# EAGLE board RGBAmp_10x10 (EAGLE 6.6.0)
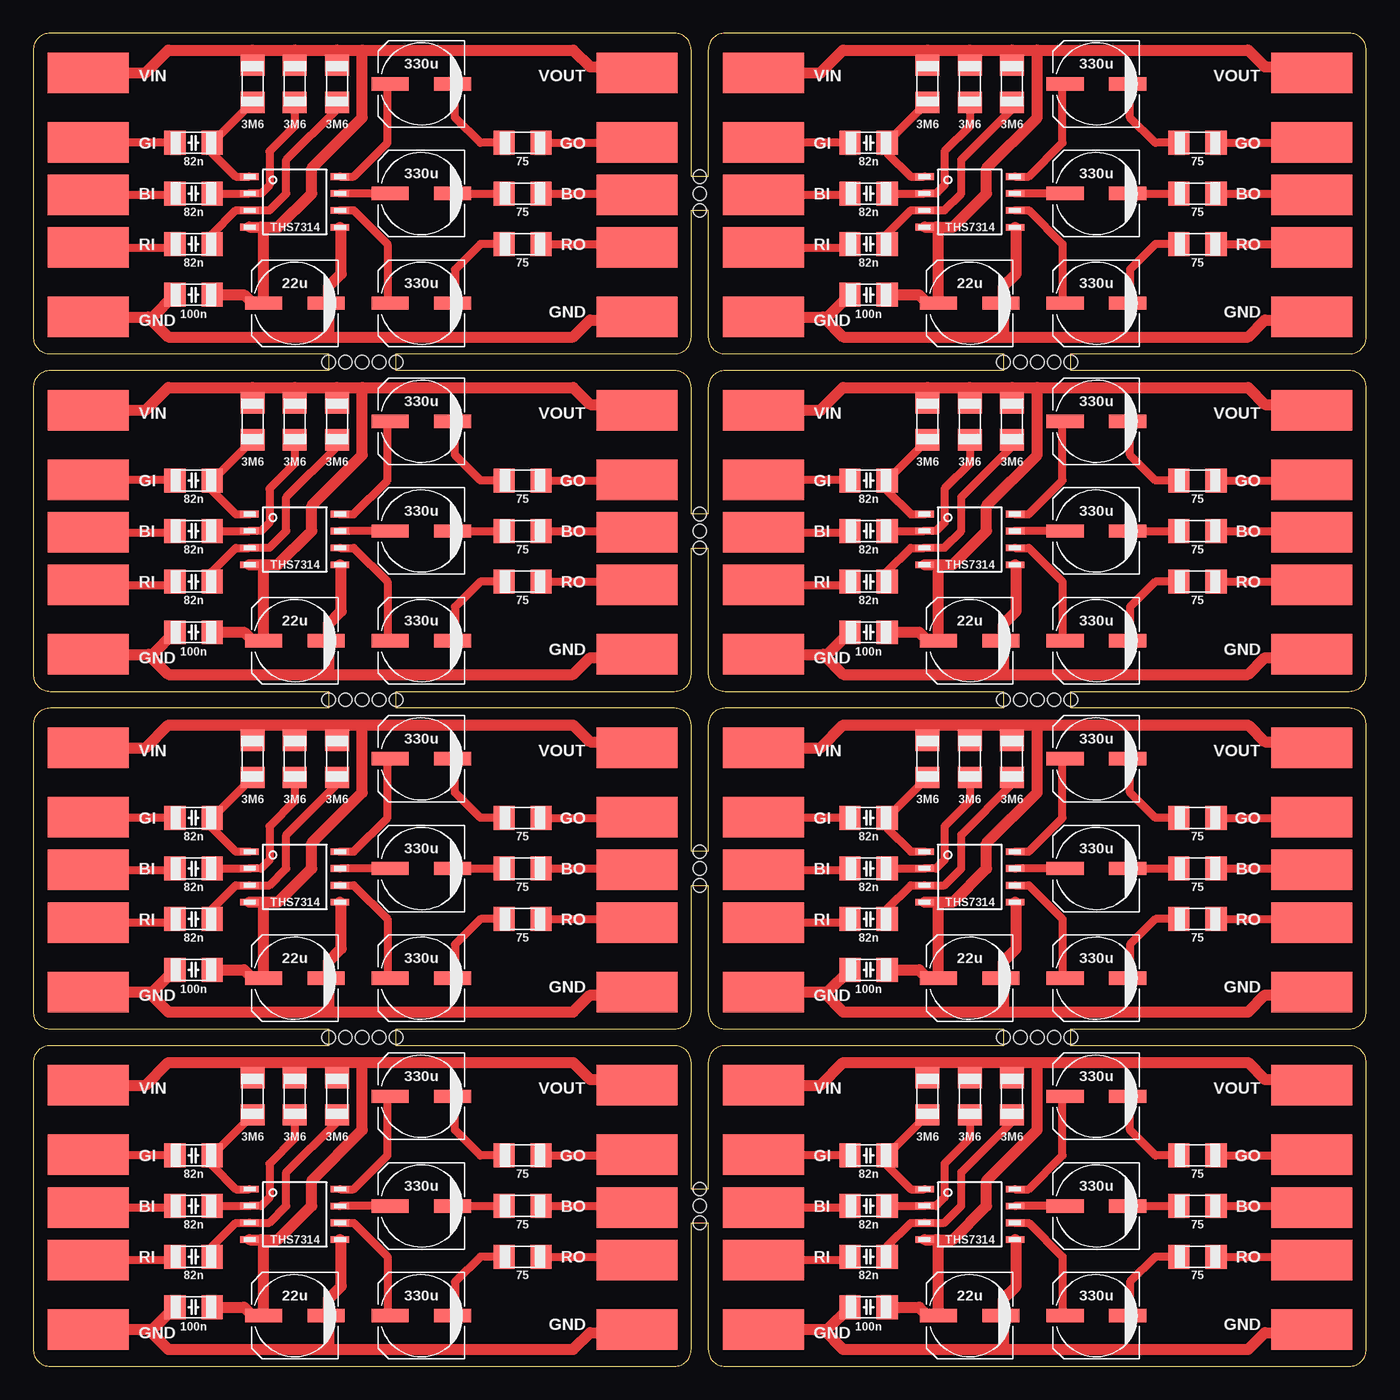
[diagram p0: board, top side]
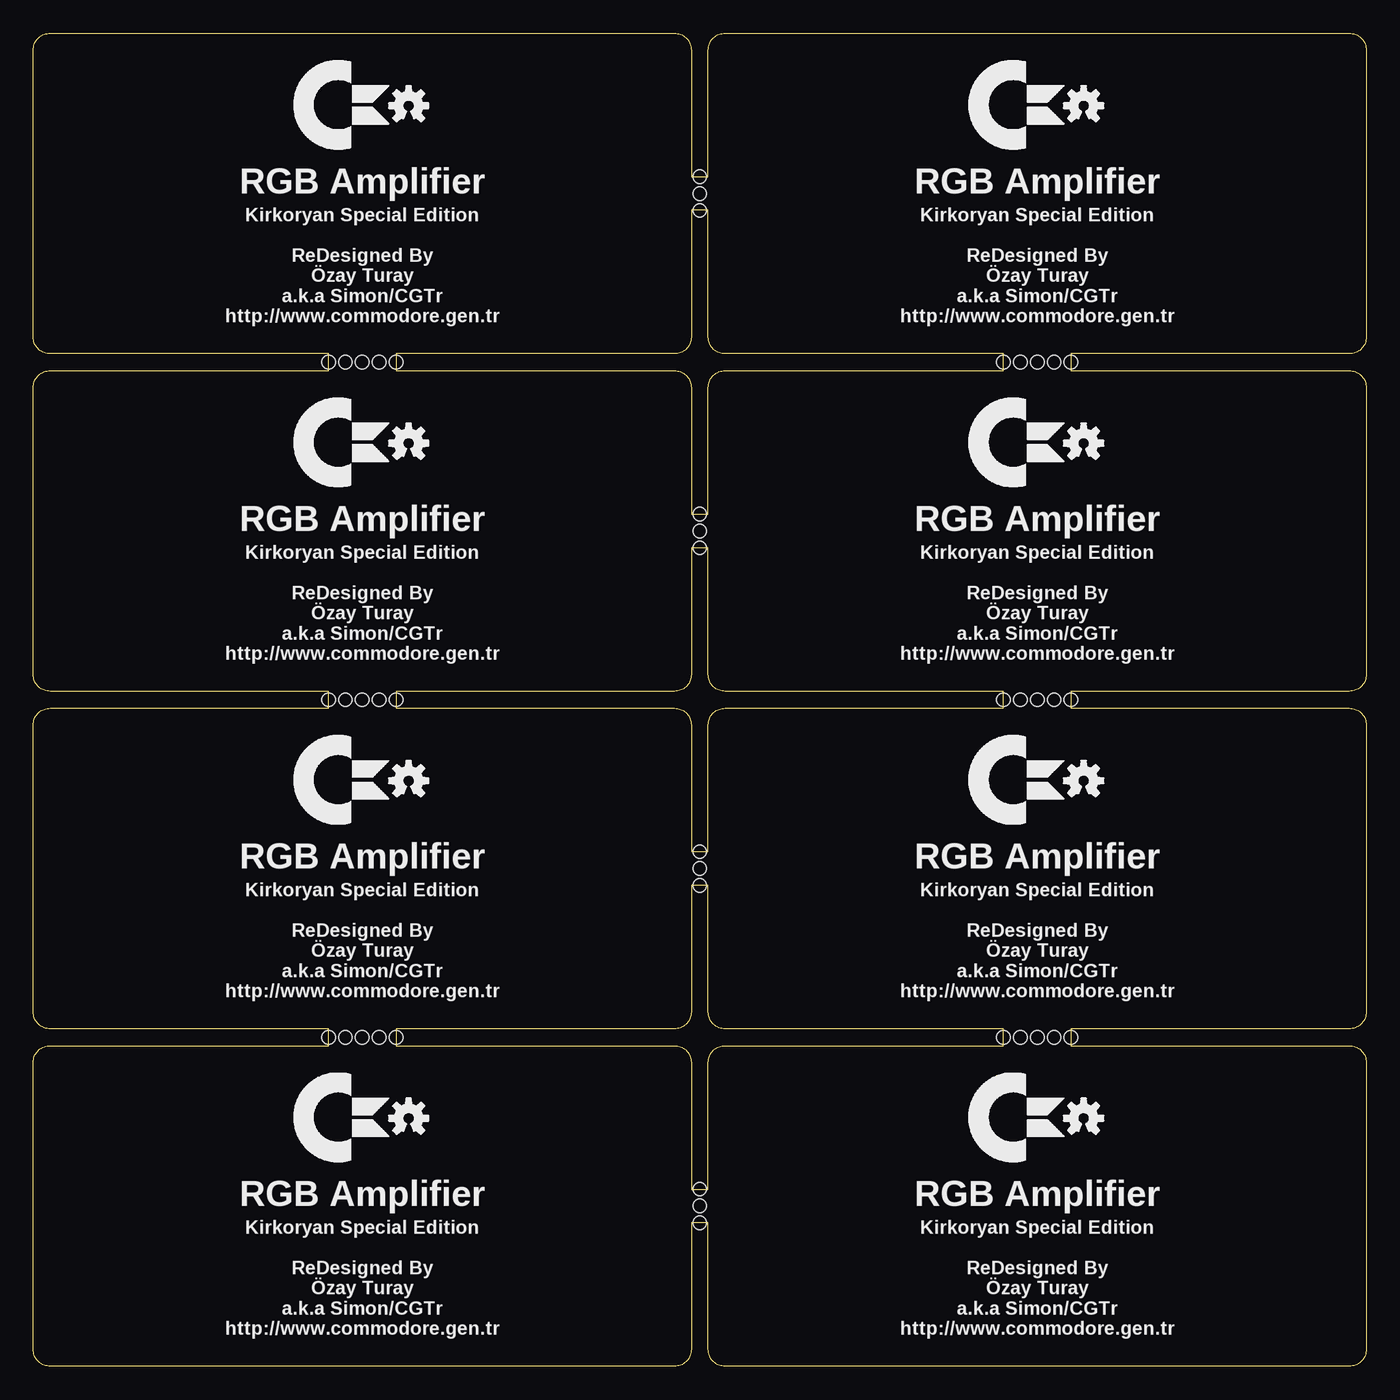
[diagram p1: board, bottom side, seen from below]

Size 100.33 x 100.33 mm. Coordinates in mm from the lower left corner, seen from the top.
Outline: 22.23,24.13 1.27,24.13 arc90 0,22.86 0,1.27 arc90 1.27,0 48.26,0 arc90 49.53,1.27 49.53,10.79 50.8,10.79 50.8,1.27 arc90 52.07,0 99.06,0 arc90 100.33,1.27 100.33,22.86 arc90 99.06,24.13 78.11,24.13 78.11,25.4 99.06,25.4 arc90 100.33,26.67 100.33,48.26 arc90 99.06,49.53 78.11,49.53 78.11,50.8 99.06,50.8 arc90 100.33,52.07 100.33,73.66 arc90 99.06,74.93 78.11,74.93 78.11,76.2 99.06,76.2 arc90 100.33,77.47 100.33,99.06 arc90 99.06,100.33 52.07,100.33 arc90 50.8,99.06 50.8,89.53 49.53,89.53 49.53,99.06 arc90 48.26,100.33 1.27,100.33 arc90 0,99.06 0,77.47 arc90 1.27,76.2 22.23,76.2 22.23,74.93 1.27,74.93 arc90 0,73.66 0,52.07 arc90 1.27,50.8 22.23,50.8 22.23,49.53 1.27,49.53 arc90 0,48.26 0,26.67 arc90 1.27,25.4 22.23,25.4 22.23,24.13
Outline: 50.8,13.34 49.53,13.34 49.53,22.86 arc90 48.26,24.13 27.3,24.13 27.3,25.4 48.26,25.4 arc90 49.53,26.67 49.53,36.2 50.8,36.2 50.8,26.67 arc90 52.07,25.4 73.03,25.4 73.03,24.13 52.07,24.13 arc90 50.8,22.86 50.8,13.34
Outline: 50.8,38.73 49.53,38.73 49.53,48.26 arc90 48.26,49.53 27.3,49.53 27.3,50.8 48.26,50.8 arc90 49.53,52.07 49.53,61.59 50.8,61.59 50.8,52.07 arc90 52.07,50.8 73.03,50.8 73.03,49.53 52.07,49.53 arc90 50.8,48.26 50.8,38.73
Outline: 50.8,64.14 49.53,64.14 49.53,73.66 arc90 48.26,74.93 27.3,74.93 27.3,76.2 48.26,76.2 arc90 49.53,77.47 49.53,87 50.8,87 50.8,77.47 arc90 52.07,76.2 73.03,76.2 73.03,74.93 52.07,74.93 arc90 50.8,73.66 50.8,64.14
Copper layers (1*16): Top 0.035mm / dielectric 1.6mm / Bottom 0.035mm
Design rules "Elecrow": minimum track width 6mil, minimum drill 12mil, track to track 6mil, track to pad 6mil, pad to pad 6mil, via to via 8mil, smd to smd 0mil, copper to edge 20mil, drill to drill 10mil, minimum pad ring 6mil, minimum via ring 6mil, stop-mask expansion 0mil, vias tented up to drill 100mil, thermal gap 10mil
Holes 1.02 mm at 22.23,24.77 23.5,24.77 24.77,24.77 26.04,24.77 27.3,24.77 73.03,24.77 74.3,24.77 75.56,24.77 76.83,24.77 78.11,24.77 22.23,75.56 23.5,75.56 24.77,75.56 26.04,75.56 27.3,75.56 73.03,75.56 74.3,75.56 75.56,75.56 76.83,75.56 78.11,75.56 50.16,10.79 50.16,12.06 50.16,13.34 50.16,36.2 50.16,37.47 50.16,38.73 50.16,61.59 50.16,62.87 50.16,64.14 50.16,87 50.16,88.27 50.16,89.53 22.23,50.16 23.5,50.16 24.77,50.16 26.04,50.16 27.3,50.16 73.03,50.16 74.3,50.16 75.56,50.16 76.83,50.16 78.11,50.16

## Footprints (pad centres in the part's own frame; a part is rotated, then mirrored left to right if it is on the bottom)
CAPACITOR_CERAMIC_1206 = smd 1.6 x 1.8: 1 -1.4,0; 2 1.4,0
CAPACITOR_POLARIZED_6.3X7.7 = smd 2.8 x 1: + 2.35,0; - -2.35,0
GBR_PADS = smd 3.048 x 6.096: B 0.102,-0.289; G -3.858,-0.289; GND 9.292,-0.289; R 4.062,-0.289; VCC -9.088,-0.289
SOP08 = smd 0.5 x 1.4: 1 -1.905,-3.404; 2 -0.645,-3.404; 3 0.625,-3.404; 4 1.895,-3.404; 5 1.905,3.404; 6 0.635,3.404; 7 -0.635,3.404; 8 -1.905,3.404
RESISTOR_1206 = smd 1.6 x 1.8: 1 -1.4,0; 2 1.4,0

## Placement (x,y rotation side)
C1  82n  [CAPACITOR_CERAMIC_1206]  12.06,15.88 0 top
C2  82n  [CAPACITOR_CERAMIC_1206]  12.06,12.06 0 top
C3  82n  [CAPACITOR_CERAMIC_1206]  12.06,8.26 0 top
C4  330u  [CAPACITOR_POLARIZED_6.3X7.7]  29.21,20.32 180 top
C5  330u  [CAPACITOR_POLARIZED_6.3X7.7]  29.21,12.06 180 top
C6  330u  [CAPACITOR_POLARIZED_6.3X7.7]  29.21,3.81 180 top
C7  100n  [CAPACITOR_CERAMIC_1206]  12.06,4.45 180 top
C8  22u  [CAPACITOR_POLARIZED_6.3X7.7]  19.68,3.81 180 top
C9  82n  [CAPACITOR_CERAMIC_1206]  62.87,15.88 0 top
C10  82n  [CAPACITOR_CERAMIC_1206]  62.87,12.06 0 top
C11  82n  [CAPACITOR_CERAMIC_1206]  62.87,8.26 0 top
C12  330u  [CAPACITOR_POLARIZED_6.3X7.7]  80.01,20.32 180 top
C13  330u  [CAPACITOR_POLARIZED_6.3X7.7]  80.01,12.06 180 top
C14  330u  [CAPACITOR_POLARIZED_6.3X7.7]  80.01,3.81 180 top
C15  100n  [CAPACITOR_CERAMIC_1206]  62.87,4.45 180 top
C16  22u  [CAPACITOR_POLARIZED_6.3X7.7]  70.48,3.81 180 top
C17  82n  [CAPACITOR_CERAMIC_1206]  62.87,41.27 0 top
C18  82n  [CAPACITOR_CERAMIC_1206]  62.87,37.47 0 top
C19  82n  [CAPACITOR_CERAMIC_1206]  62.87,33.66 0 top
C20  330u  [CAPACITOR_POLARIZED_6.3X7.7]  80.01,45.72 180 top
C21  330u  [CAPACITOR_POLARIZED_6.3X7.7]  80.01,37.47 180 top
C22  330u  [CAPACITOR_POLARIZED_6.3X7.7]  80.01,29.21 180 top
C23  100n  [CAPACITOR_CERAMIC_1206]  62.87,29.84 180 top
C24  22u  [CAPACITOR_POLARIZED_6.3X7.7]  70.48,29.21 180 top
C25  82n  [CAPACITOR_CERAMIC_1206]  12.06,41.27 0 top
C26  82n  [CAPACITOR_CERAMIC_1206]  12.06,37.47 0 top
C27  82n  [CAPACITOR_CERAMIC_1206]  12.06,33.66 0 top
C28  330u  [CAPACITOR_POLARIZED_6.3X7.7]  29.21,45.72 180 top
C29  330u  [CAPACITOR_POLARIZED_6.3X7.7]  29.21,37.47 180 top
C30  330u  [CAPACITOR_POLARIZED_6.3X7.7]  29.21,29.21 180 top
C31  100n  [CAPACITOR_CERAMIC_1206]  12.06,29.84 180 top
C32  22u  [CAPACITOR_POLARIZED_6.3X7.7]  19.68,29.21 180 top
C33  82n  [CAPACITOR_CERAMIC_1206]  12.06,66.67 0 top
C34  82n  [CAPACITOR_CERAMIC_1206]  12.06,62.87 0 top
C35  82n  [CAPACITOR_CERAMIC_1206]  12.06,59.05 0 top
C36  330u  [CAPACITOR_POLARIZED_6.3X7.7]  29.21,71.12 180 top
C37  330u  [CAPACITOR_POLARIZED_6.3X7.7]  29.21,62.87 180 top
C38  330u  [CAPACITOR_POLARIZED_6.3X7.7]  29.21,54.61 180 top
C39  100n  [CAPACITOR_CERAMIC_1206]  12.06,55.24 180 top
C40  22u  [CAPACITOR_POLARIZED_6.3X7.7]  19.68,54.61 180 top
C41  82n  [CAPACITOR_CERAMIC_1206]  62.87,66.67 0 top
C42  82n  [CAPACITOR_CERAMIC_1206]  62.87,62.87 0 top
C43  82n  [CAPACITOR_CERAMIC_1206]  62.87,59.05 0 top
C44  330u  [CAPACITOR_POLARIZED_6.3X7.7]  80.01,71.12 180 top
C45  330u  [CAPACITOR_POLARIZED_6.3X7.7]  80.01,62.87 180 top
C46  330u  [CAPACITOR_POLARIZED_6.3X7.7]  80.01,54.61 180 top
C47  100n  [CAPACITOR_CERAMIC_1206]  62.87,55.24 180 top
C48  22u  [CAPACITOR_POLARIZED_6.3X7.7]  70.48,54.61 180 top
C49  82n  [CAPACITOR_CERAMIC_1206]  12.06,92.08 0 top
C50  82n  [CAPACITOR_CERAMIC_1206]  12.06,88.27 0 top
C51  82n  [CAPACITOR_CERAMIC_1206]  12.06,84.45 0 top
C52  330u  [CAPACITOR_POLARIZED_6.3X7.7]  29.21,96.52 180 top
C53  330u  [CAPACITOR_POLARIZED_6.3X7.7]  29.21,88.27 180 top
C54  330u  [CAPACITOR_POLARIZED_6.3X7.7]  29.21,80.01 180 top
C55  100n  [CAPACITOR_CERAMIC_1206]  12.06,80.64 180 top
C56  22u  [CAPACITOR_POLARIZED_6.3X7.7]  19.68,80.01 180 top
C57  82n  [CAPACITOR_CERAMIC_1206]  62.87,92.08 0 top
C58  82n  [CAPACITOR_CERAMIC_1206]  62.87,88.27 0 top
C59  82n  [CAPACITOR_CERAMIC_1206]  62.87,84.45 0 top
C60  330u  [CAPACITOR_POLARIZED_6.3X7.7]  80.01,96.52 180 top
C61  330u  [CAPACITOR_POLARIZED_6.3X7.7]  80.01,88.27 180 top
C62  330u  [CAPACITOR_POLARIZED_6.3X7.7]  80.01,80.01 180 top
C63  100n  [CAPACITOR_CERAMIC_1206]  62.87,80.64 180 top
C64  22u  [CAPACITOR_POLARIZED_6.3X7.7]  70.48,80.01 180 top
CN1  INPUT  [GBR_PADS]  4.45,12.06 270 top
CN2  OUTPUT  [GBR_PADS]  45.72,12.06 270 top
CN3  INPUT  [GBR_PADS]  55.24,12.06 270 top
CN4  OUTPUT  [GBR_PADS]  96.52,12.06 270 top
CN5  INPUT  [GBR_PADS]  55.24,37.47 270 top
CN6  OUTPUT  [GBR_PADS]  96.52,37.47 270 top
CN7  INPUT  [GBR_PADS]  4.45,37.47 270 top
CN8  OUTPUT  [GBR_PADS]  45.72,37.47 270 top
CN9  INPUT  [GBR_PADS]  4.45,62.87 270 top
CN10  OUTPUT  [GBR_PADS]  45.72,62.87 270 top
CN11  INPUT  [GBR_PADS]  55.24,62.87 270 top
CN12  OUTPUT  [GBR_PADS]  96.52,62.87 270 top
CN13  INPUT  [GBR_PADS]  4.45,88.27 270 top
CN14  OUTPUT  [GBR_PADS]  45.72,88.27 270 top
CN15  INPUT  [GBR_PADS]  55.24,88.27 270 top
CN16  OUTPUT  [GBR_PADS]  96.52,88.27 270 top
LOGO1  OSHW_LOGO_SMALL  [OSHW_LOGO_SMALL]  21.27,18.67 0 bottom
LOGO2  OSHW_LOGO_SMALL  [OSHW_LOGO_SMALL]  72.07,18.67 0 bottom
LOGO3  OSHW_LOGO_SMALL  [OSHW_LOGO_SMALL]  72.07,44.07 0 bottom
LOGO4  OSHW_LOGO_SMALL  [OSHW_LOGO_SMALL]  21.27,44.07 0 bottom
LOGO5  OSHW_LOGO_SMALL  [OSHW_LOGO_SMALL]  21.27,69.47 0 bottom
LOGO6  OSHW_LOGO_SMALL  [OSHW_LOGO_SMALL]  72.07,69.47 0 bottom
LOGO7  OSHW_LOGO_SMALL  [OSHW_LOGO_SMALL]  21.27,94.87 0 bottom
LOGO8  OSHW_LOGO_SMALL  [OSHW_LOGO_SMALL]  72.07,94.87 0 bottom
MCU1  THS7314  [SOP08]  19.68,11.43 270 top
MCU2  THS7314  [SOP08]  70.48,11.43 270 top
MCU3  THS7314  [SOP08]  70.48,36.83 270 top
MCU4  THS7314  [SOP08]  19.68,36.83 270 top
MCU5  THS7314  [SOP08]  19.68,62.23 270 top
MCU6  THS7314  [SOP08]  70.48,62.23 270 top
MCU7  THS7314  [SOP08]  19.68,87.63 270 top
MCU8  THS7314  [SOP08]  70.48,87.63 270 top
R1  3M6  [RESISTOR_1206]  16.51,20.32 90 top
R2  3M6  [RESISTOR_1206]  19.68,20.32 90 top
R3  3M6  [RESISTOR_1206]  22.86,20.32 90 top
R4  75  [RESISTOR_1206]  36.83,15.88 0 top
R5  75  [RESISTOR_1206]  36.83,12.06 0 top
R6  75  [RESISTOR_1206]  36.83,8.26 0 top
R7  3M6  [RESISTOR_1206]  67.31,20.32 90 top
R8  3M6  [RESISTOR_1206]  70.48,20.32 90 top
R9  3M6  [RESISTOR_1206]  73.66,20.32 90 top
R10  75  [RESISTOR_1206]  87.63,15.88 0 top
R11  75  [RESISTOR_1206]  87.63,12.06 0 top
R12  75  [RESISTOR_1206]  87.63,8.26 0 top
R13  3M6  [RESISTOR_1206]  67.31,45.72 90 top
R14  3M6  [RESISTOR_1206]  70.48,45.72 90 top
R15  3M6  [RESISTOR_1206]  73.66,45.72 90 top
R16  75  [RESISTOR_1206]  87.63,41.27 0 top
R17  75  [RESISTOR_1206]  87.63,37.47 0 top
R18  75  [RESISTOR_1206]  87.63,33.66 0 top
R19  3M6  [RESISTOR_1206]  16.51,45.72 90 top
R20  3M6  [RESISTOR_1206]  19.68,45.72 90 top
R21  3M6  [RESISTOR_1206]  22.86,45.72 90 top
R22  75  [RESISTOR_1206]  36.83,41.27 0 top
R23  75  [RESISTOR_1206]  36.83,37.47 0 top
R24  75  [RESISTOR_1206]  36.83,33.66 0 top
R25  3M6  [RESISTOR_1206]  16.51,71.12 90 top
R26  3M6  [RESISTOR_1206]  19.68,71.12 90 top
R27  3M6  [RESISTOR_1206]  22.86,71.12 90 top
R28  75  [RESISTOR_1206]  36.83,66.67 0 top
R29  75  [RESISTOR_1206]  36.83,62.87 0 top
R30  75  [RESISTOR_1206]  36.83,59.05 0 top
R31  3M6  [RESISTOR_1206]  67.31,71.12 90 top
R32  3M6  [RESISTOR_1206]  70.48,71.12 90 top
R33  3M6  [RESISTOR_1206]  73.66,71.12 90 top
R34  75  [RESISTOR_1206]  87.63,66.67 0 top
R35  75  [RESISTOR_1206]  87.63,62.87 0 top
R36  75  [RESISTOR_1206]  87.63,59.05 0 top
R37  3M6  [RESISTOR_1206]  16.51,96.52 90 top
R38  3M6  [RESISTOR_1206]  19.68,96.52 90 top
R39  3M6  [RESISTOR_1206]  22.86,96.52 90 top
R40  75  [RESISTOR_1206]  36.83,92.08 0 top
R41  75  [RESISTOR_1206]  36.83,88.27 0 top
R42  75  [RESISTOR_1206]  36.83,84.45 0 top
R43  3M6  [RESISTOR_1206]  67.31,96.52 90 top
R44  3M6  [RESISTOR_1206]  70.48,96.52 90 top
R45  3M6  [RESISTOR_1206]  73.66,96.52 90 top
R46  75  [RESISTOR_1206]  87.63,92.08 0 top
R47  75  [RESISTOR_1206]  87.63,88.27 0 top
R48  75  [RESISTOR_1206]  87.63,84.45 0 top

## Library data of the parts
C1-C64 LOGO1-LOGO8 R1-R48 = sj_standart
CN1-CN16 = sj_connectors
MCU1-MCU8 = sj_ic

## Nets
GND: C7.2 C8.- CN1.GND CN2.GND MCU1.5
GND1: C15.2 C16.- CN3.GND CN4.GND MCU2.5
GND2: C23.2 C24.- CN5.GND CN6.GND MCU3.5
GND3: C31.2 C32.- CN7.GND CN8.GND MCU4.5
GND4: C39.2 C40.- CN9.GND CN10.GND MCU5.5
GND5: C47.2 C48.- CN11.GND CN12.GND MCU6.5
GND6: C55.2 C56.- CN13.GND CN14.GND MCU7.5
GND7: C63.2 C64.- CN15.GND CN16.GND MCU8.5
N$1: C1.2 MCU1.1 R1.1
N$2: C2.2 MCU1.2 R2.1
N$3: C3.2 MCU1.3 R3.1
N$4: C2.1 CN1.B
N$5: C1.1 CN1.G
N$6: C3.1 CN1.R
N$7: C4.+ MCU1.8
N$8: C5.+ MCU1.7
N$9: C6.+ MCU1.6
N$10: C4.- R4.1
N$11: C5.- R5.1
N$12: C6.- R6.1
N$13: CN2.G R4.2
N$14: CN2.B R5.2
N$15: CN2.R R6.2
N$16: C9.2 MCU2.1 R7.1
N$17: C10.2 MCU2.2 R8.1
N$18: C11.2 MCU2.3 R9.1
N$19: C10.1 CN3.B
N$20: C9.1 CN3.G
N$21: C11.1 CN3.R
N$22: C12.+ MCU2.8
N$23: C13.+ MCU2.7
N$24: C14.+ MCU2.6
N$25: C12.- R10.1
N$26: C13.- R11.1
N$27: C14.- R12.1
N$28: CN4.G R10.2
N$29: CN4.B R11.2
N$30: CN4.R R12.2
N$31: C17.2 MCU3.1 R13.1
N$32: C18.2 MCU3.2 R14.1
N$33: C19.2 MCU3.3 R15.1
N$34: C18.1 CN5.B
N$35: C17.1 CN5.G
N$36: C19.1 CN5.R
N$37: C20.+ MCU3.8
N$38: C21.+ MCU3.7
N$39: C22.+ MCU3.6
N$40: C20.- R16.1
N$41: C21.- R17.1
N$42: C22.- R18.1
N$43: CN6.G R16.2
N$44: CN6.B R17.2
N$45: CN6.R R18.2
N$46: C25.2 MCU4.1 R19.1
N$47: C26.2 MCU4.2 R20.1
N$48: C27.2 MCU4.3 R21.1
N$49: C26.1 CN7.B
N$50: C25.1 CN7.G
N$51: C27.1 CN7.R
N$52: C28.+ MCU4.8
N$53: C29.+ MCU4.7
N$54: C30.+ MCU4.6
N$55: C28.- R22.1
N$56: C29.- R23.1
N$57: C30.- R24.1
N$58: CN8.G R22.2
N$59: CN8.B R23.2
N$60: CN8.R R24.2
N$61: C33.2 MCU5.1 R25.1
N$62: C34.2 MCU5.2 R26.1
N$63: C35.2 MCU5.3 R27.1
N$64: C34.1 CN9.B
N$65: C33.1 CN9.G
N$66: C35.1 CN9.R
N$67: C36.+ MCU5.8
N$68: C37.+ MCU5.7
N$69: C38.+ MCU5.6
N$70: C36.- R28.1
N$71: C37.- R29.1
N$72: C38.- R30.1
N$73: CN10.G R28.2
N$74: CN10.B R29.2
N$75: CN10.R R30.2
N$76: C41.2 MCU6.1 R31.1
N$77: C42.2 MCU6.2 R32.1
N$78: C43.2 MCU6.3 R33.1
N$79: C42.1 CN11.B
N$80: C41.1 CN11.G
N$81: C43.1 CN11.R
N$82: C44.+ MCU6.8
N$83: C45.+ MCU6.7
N$84: C46.+ MCU6.6
N$85: C44.- R34.1
N$86: C45.- R35.1
N$87: C46.- R36.1
N$88: CN12.G R34.2
N$89: CN12.B R35.2
N$90: CN12.R R36.2
N$91: C49.2 MCU7.1 R37.1
N$92: C50.2 MCU7.2 R38.1
N$93: C51.2 MCU7.3 R39.1
N$94: C50.1 CN13.B
N$95: C49.1 CN13.G
N$96: C51.1 CN13.R
N$97: C52.+ MCU7.8
N$98: C53.+ MCU7.7
N$99: C54.+ MCU7.6
N$100: C52.- R40.1
N$101: C53.- R41.1
N$102: C54.- R42.1
N$103: CN14.G R40.2
N$104: CN14.B R41.2
N$105: CN14.R R42.2
N$106: C57.2 MCU8.1 R43.1
N$107: C58.2 MCU8.2 R44.1
N$108: C59.2 MCU8.3 R45.1
N$109: C58.1 CN15.B
N$110: C57.1 CN15.G
N$111: C59.1 CN15.R
N$112: C60.+ MCU8.8
N$113: C61.+ MCU8.7
N$114: C62.+ MCU8.6
N$115: C60.- R46.1
N$116: C61.- R47.1
N$117: C62.- R48.1
N$118: CN16.G R46.2
N$119: CN16.B R47.2
N$120: CN16.R R48.2
VCC: C7.1 C8.+ CN1.VCC CN2.VCC MCU1.4 R1.2 R2.2 R3.2
VCC1: C15.1 C16.+ CN3.VCC CN4.VCC MCU2.4 R7.2 R8.2 R9.2
VCC2: C23.1 C24.+ CN5.VCC CN6.VCC MCU3.4 R13.2 R14.2 R15.2
VCC3: C31.1 C32.+ CN7.VCC CN8.VCC MCU4.4 R19.2 R20.2 R21.2
VCC4: C39.1 C40.+ CN9.VCC CN10.VCC MCU5.4 R25.2 R26.2 R27.2
VCC5: C47.1 C48.+ CN11.VCC CN12.VCC MCU6.4 R31.2 R32.2 R33.2
VCC6: C55.1 C56.+ CN13.VCC CN14.VCC MCU7.4 R37.2 R38.2 R39.2
VCC7: C63.1 C64.+ CN15.VCC CN16.VCC MCU8.4 R43.2 R44.2 R45.2

## Tracks (layer width: path | path; a pad name or v marks a point on that pad's centre or on a via)
GND
  Top 0.813: CN1.GND 8.66,2.77 | 8.66,2.77 10.16,1.27 22.23,1.27 | 22.23,1.27 40.64,1.27 41.91,2.54 45.83,2.54 CN2.GND | C8.- 22.23,3.81 | 22.23,3.81 22.23,1.27 | 8.66,2.77 8.99,2.77 C7.2 | 22.23,3.81 22.23,5.08 23.18,6.03 23.18,9.44 MCU1.5
GND1
  Top 0.813: CN3.GND 59.46,2.77 | 59.46,2.77 60.96,1.27 73.03,1.27 | 73.03,1.27 91.44,1.27 92.71,2.54 96.63,2.54 CN4.GND | C16.- 73.03,3.81 | 73.03,3.81 73.03,1.27 | 59.46,2.77 59.79,2.77 C15.2 | 73.03,3.81 73.03,5.08 73.98,6.03 73.98,9.44 MCU2.5
GND2
  Top 0.813: CN5.GND 59.46,28.17 | 59.46,28.17 60.96,26.67 73.03,26.67 | 73.03,26.67 91.44,26.67 92.71,27.94 96.63,27.94 CN6.GND | C24.- 73.03,29.21 | 73.03,29.21 73.03,26.67 | 59.46,28.17 59.79,28.17 C23.2 | 73.03,29.21 73.03,30.48 73.98,31.43 73.98,34.84 MCU3.5
GND3
  Top 0.813: CN7.GND 8.66,28.17 | 8.66,28.17 10.16,26.67 22.23,26.67 | 22.23,26.67 40.64,26.67 41.91,27.94 45.83,27.94 CN8.GND | C32.- 22.23,29.21 | 22.23,29.21 22.23,26.67 | 8.66,28.17 8.99,28.17 C31.2 | 22.23,29.21 22.23,30.48 23.18,31.43 23.18,34.84 MCU4.5
GND4
  Top 0.813: CN9.GND 8.66,53.57 | 8.66,53.57 10.16,52.07 22.23,52.07 | 22.23,52.07 40.64,52.07 41.91,53.34 45.83,53.34 CN10.GND | C40.- 22.23,54.61 | 22.23,54.61 22.23,52.07 | 8.66,53.57 8.99,53.57 C39.2 | 22.23,54.61 22.23,55.88 23.18,56.83 23.18,60.24 MCU5.5
GND5
  Top 0.813: CN11.GND 59.46,53.57 | 59.46,53.57 60.96,52.07 73.03,52.07 | 73.03,52.07 91.44,52.07 92.71,53.34 96.63,53.34 CN12.GND | C48.- 73.03,54.61 | 73.03,54.61 73.03,52.07 | 59.46,53.57 59.79,53.57 C47.2 | 73.03,54.61 73.03,55.88 73.98,56.83 73.98,60.24 MCU6.5
GND6
  Top 0.813: CN13.GND 8.66,78.97 | 8.66,78.97 10.16,77.47 22.23,77.47 | 22.23,77.47 40.64,77.47 41.91,78.74 45.83,78.74 CN14.GND | C56.- 22.23,80.01 | 22.23,80.01 22.23,77.47 | 8.66,78.97 8.99,78.97 C55.2 | 22.23,80.01 22.23,81.28 23.18,82.23 23.18,85.64 MCU7.5
GND7
  Top 0.813: CN15.GND 59.46,78.97 | 59.46,78.97 60.96,77.47 73.03,77.47 | 73.03,77.47 91.44,77.47 92.71,78.74 96.63,78.74 CN16.GND | C64.- 73.03,80.01 | 73.03,80.01 73.03,77.47 | 59.46,78.97 59.79,78.97 C63.2 | 73.03,80.01 73.03,81.28 73.98,82.23 73.98,85.64 MCU8.5
N$1
  Top 0.61: MCU1.1 15.24,13.34 13.46,15.11 C1.2 R1.1
N$2
  Top 0.61: C2.2 MCU1.2 16.29,12.06 17.14,12.06 17.78,12.7 17.78,15.24 19.68,17.14 R2.1
N$3
  Top 0.61: C3.2 13.46,9.02 15.24,10.79 MCU1.3 17.79,10.8 19.05,12.06 19.05,14.61 22.86,18.41 R3.1
N$4
  Top 0.61: CN1.B 10.56,11.96 C2.1
N$5
  Top 0.61: CN1.G 10.62,15.92 C1.1
N$6
  Top 0.61: CN1.R 10.41,8 C3.1
N$7
  Top 0.61: MCU1.8 24.13,13.34 26.67,15.88 26.67,20.13 C4.+
N$8
  Top 0.61: C5.+ MCU1.7
N$9
  Top 0.61: MCU1.6 24.13,10.79 26.67,8.26 26.67,4 C6.+
N$10
  Top 0.61: R4.1 33.66,15.88 31.75,17.78 31.75,20.13 C4.-
N$11
  Top 0.61: C5.- R5.1
N$12
  Top 0.61: R6.1 33.66,8.26 31.75,6.35 31.75,4 C6.-
N$13
  Top 0.61: R4.2 46.02,15.88 CN2.G
N$14
  Top 0.61: R5.2 45.96,12.06 CN2.B
N$15
  Top 0.61: R6.2 45.81,8.26 CN2.R
N$16
  Top 0.61: MCU2.1 66.04,13.34 64.27,15.11 C9.2 R7.1
N$17
  Top 0.61: C10.2 MCU2.2 67.94,12.06 68.58,12.7 68.58,15.24 70.48,17.14 R8.1
N$18
  Top 0.61: C11.2 64.27,9.02 66.04,10.79 MCU2.3 68.59,10.8 69.85,12.06 69.85,14.61 73.66,18.41 R9.1
N$19
  Top 0.61: CN3.B 61.36,11.96 C10.1
N$20
  Top 0.61: CN3.G 61.42,15.92 C9.1
N$21
  Top 0.61: CN3.R 61.21,8 C11.1
N$22
  Top 0.61: MCU2.8 74.93,13.34 77.47,15.88 77.47,20.13 C12.+
N$23
  Top 0.61: C13.+ MCU2.7
N$24
  Top 0.61: MCU2.6 74.93,10.79 77.47,8.26 77.47,4 C14.+
N$25
  Top 0.61: R10.1 84.45,15.88 82.55,17.78 82.55,20.13 C12.-
N$26
  Top 0.61: C13.- R11.1
N$27
  Top 0.61: R12.1 84.45,8.26 82.55,6.35 82.55,4 C14.-
N$28
  Top 0.61: R10.2 96.82,15.88 CN4.G
N$29
  Top 0.61: R11.2 96.76,12.06 CN4.B
N$30
  Top 0.61: R12.2 96.61,8.26 CN4.R
N$31
  Top 0.61: MCU3.1 66.04,38.73 64.27,40.51 C17.2 R13.1
N$32
  Top 0.61: C18.2 67.07,37.47 MCU3.2 67.09,37.47 67.94,37.47 68.58,38.1 68.58,40.64 70.48,42.55 R14.1
N$33
  Top 0.61: C19.2 64.27,34.42 66.04,36.2 MCU3.3 68.59,36.2 69.85,37.47 69.85,40.01 73.66,43.81 R15.1
N$34
  Top 0.61: CN5.B 61.36,37.36 C18.1
N$35
  Top 0.61: CN5.G 61.42,41.32 C17.1
N$36
  Top 0.61: CN5.R 61.21,33.4 C19.1
N$37
  Top 0.61: MCU3.8 74.93,38.73 77.47,41.27 77.47,45.53 C20.+
N$38
  Top 0.61: C21.+ MCU3.7
N$39
  Top 0.61: MCU3.6 74.93,36.2 77.47,33.66 77.47,29.4 C22.+
N$40
  Top 0.61: R16.1 84.45,41.27 82.55,43.18 82.55,45.53 C20.-
N$41
  Top 0.61: C21.- R17.1
N$42
  Top 0.61: R18.1 84.45,33.66 82.55,31.75 82.55,29.4 C22.-
N$43
  Top 0.61: R16.2 96.82,41.27 CN6.G
N$44
  Top 0.61: R17.2 96.76,37.47 CN6.B
N$45
  Top 0.61: R18.2 96.61,33.66 CN6.R
N$46
  Top 0.61: MCU4.1 15.24,38.73 13.46,40.51 C25.2 R19.1
N$47
  Top 0.61: C26.2 16.27,37.47 MCU4.2 16.29,37.47 17.14,37.47 17.78,38.1 17.78,40.64 19.68,42.55 R20.1
N$48
  Top 0.61: C27.2 13.46,34.42 15.24,36.2 MCU4.3 17.79,36.2 19.05,37.47 19.05,40.01 22.86,43.81 R21.1
N$49
  Top 0.61: CN7.B 10.56,37.36 C26.1
N$50
  Top 0.61: CN7.G 10.62,41.32 C25.1
N$51
  Top 0.61: CN7.R 10.41,33.4 C27.1
N$52
  Top 0.61: MCU4.8 24.13,38.73 26.67,41.27 26.67,45.53 C28.+
N$53
  Top 0.61: C29.+ MCU4.7
N$54
  Top 0.61: MCU4.6 24.13,36.2 26.67,33.66 26.67,29.4 C30.+
N$55
  Top 0.61: R22.1 33.66,41.27 31.75,43.18 31.75,45.53 C28.-
N$56
  Top 0.61: C29.- R23.1
N$57
  Top 0.61: R24.1 33.66,33.66 31.75,31.75 31.75,29.4 C30.-
N$58
  Top 0.61: R22.2 46.02,41.27 CN8.G
N$59
  Top 0.61: R23.2 45.96,37.47 CN8.B
N$60
  Top 0.61: R24.2 45.81,33.66 CN8.R
N$61
  Top 0.61: MCU5.1 15.24,64.14 13.46,65.91 C33.2 R25.1
N$62
  Top 0.61: C34.2 16.27,62.87 MCU5.2 16.29,62.87 17.14,62.87 17.78,63.5 17.78,66.04 19.68,67.94 R26.1
N$63
  Top 0.61: C35.2 13.46,59.82 15.24,61.59 MCU5.3 17.79,61.6 19.05,62.87 19.05,65.41 22.86,69.22 R27.1
N$64
  Top 0.61: CN9.B 10.56,62.76 C34.1
N$65
  Top 0.61: CN9.G 10.62,66.72 C33.1
N$66
  Top 0.61: CN9.R 10.41,58.8 C35.1
N$67
  Top 0.61: MCU5.8 24.13,64.14 26.67,66.67 26.67,70.93 C36.+
N$68
  Top 0.61: C37.+ MCU5.7
N$69
  Top 0.61: MCU5.6 24.13,61.59 26.67,59.05 26.67,54.8 C38.+
N$70
  Top 0.61: R28.1 33.66,66.67 31.75,68.58 31.75,70.93 C36.-
N$71
  Top 0.61: C37.- R29.1
N$72
  Top 0.61: R30.1 33.66,59.05 31.75,57.15 31.75,54.8 C38.-
N$73
  Top 0.61: R28.2 46.02,66.67 CN10.G
N$74
  Top 0.61: R29.2 45.96,62.87 CN10.B
N$75
  Top 0.61: R30.2 45.81,59.05 CN10.R
N$76
  Top 0.61: MCU6.1 66.04,64.14 64.27,65.91 C41.2 R31.1
N$77
  Top 0.61: C42.2 67.07,62.87 MCU6.2 67.09,62.87 67.94,62.87 68.58,63.5 68.58,66.04 70.48,67.94 R32.1
N$78
  Top 0.61: C43.2 64.27,59.82 66.04,61.59 MCU6.3 68.59,61.6 69.85,62.87 69.85,65.41 73.66,69.22 R33.1
N$79
  Top 0.61: CN11.B 61.36,62.76 C42.1
N$80
  Top 0.61: CN11.G 61.42,66.72 C41.1
N$81
  Top 0.61: CN11.R 61.21,58.8 C43.1
N$82
  Top 0.61: MCU6.8 74.93,64.14 77.47,66.67 77.47,70.93 C44.+
N$83
  Top 0.61: C45.+ MCU6.7
N$84
  Top 0.61: MCU6.6 74.93,61.59 77.47,59.05 77.47,54.8 C46.+
N$85
  Top 0.61: R34.1 84.45,66.67 82.55,68.58 82.55,70.93 C44.-
N$86
  Top 0.61: C45.- R35.1
N$87
  Top 0.61: R36.1 84.45,59.05 82.55,57.15 82.55,54.8 C46.-
N$88
  Top 0.61: R34.2 96.82,66.67 CN12.G
N$89
  Top 0.61: R35.2 96.76,62.87 CN12.B
N$90
  Top 0.61: R36.2 96.61,59.05 CN12.R
N$91
  Top 0.61: MCU7.1 15.24,89.53 13.46,91.31 C49.2 R37.1
N$92
  Top 0.61: C50.2 MCU7.2 16.29,88.27 17.14,88.27 17.78,88.9 17.78,91.44 19.68,93.34 R38.1
N$93
  Top 0.61: C51.2 13.46,85.22 15.24,87 MCU7.3 17.79,87 19.05,88.27 19.05,90.81 22.86,94.61 R39.1
N$94
  Top 0.61: CN13.B 10.56,88.16 C50.1
N$95
  Top 0.61: CN13.G 10.62,92.12 C49.1
N$96
  Top 0.61: CN13.R 10.41,84.2 C51.1
N$97
  Top 0.61: MCU7.8 24.13,89.53 26.67,92.08 26.67,96.33 C52.+
N$98
  Top 0.61: C53.+ MCU7.7
N$99
  Top 0.61: MCU7.6 24.13,87 26.67,84.45 26.67,80.2 C54.+
N$100
  Top 0.61: R40.1 33.66,92.08 31.75,93.98 31.75,96.33 C52.-
N$101
  Top 0.61: C53.- R41.1
N$102
  Top 0.61: R42.1 33.66,84.45 31.75,82.55 31.75,80.2 C54.-
N$103
  Top 0.61: R40.2 46.02,92.08 CN14.G
N$104
  Top 0.61: R41.2 45.96,88.27 CN14.B
N$105
  Top 0.61: R42.2 45.81,84.45 CN14.R
N$106
  Top 0.61: MCU8.1 66.04,89.53 64.27,91.31 C57.2 R43.1
N$107
  Top 0.61: C58.2 MCU8.2 67.94,88.27 68.58,88.9 68.58,91.44 70.48,93.34 R44.1
N$108
  Top 0.61: C59.2 64.27,85.22 66.04,87 MCU8.3 68.59,87 69.85,88.27 69.85,90.81 73.66,94.61 R45.1
N$109
  Top 0.61: CN15.B 61.36,88.16 C58.1
N$110
  Top 0.61: CN15.G 61.42,92.12 C57.1
N$111
  Top 0.61: CN15.R 61.21,84.2 C59.1
N$112
  Top 0.61: MCU8.8 74.93,89.53 77.47,92.08 77.47,96.33 C60.+
N$113
  Top 0.61: C61.+ MCU8.7
N$114
  Top 0.61: MCU8.6 74.93,87 77.47,84.45 77.47,80.2 C62.+
N$115
  Top 0.61: R46.1 84.45,92.08 82.55,93.98 82.55,96.33 C60.-
N$116
  Top 0.61: C61.- R47.1
N$117
  Top 0.61: R48.1 84.45,84.45 82.55,82.55 82.55,80.2 C62.-
N$118
  Top 0.61: R46.2 96.82,92.08 CN16.G
N$119
  Top 0.61: R47.2 96.76,88.27 CN16.B
N$120
  Top 0.61: R48.2 96.61,84.45 CN16.R
VCC
  Top 0.406: CN2.VCC 45.72,21.15 45.72,21.59 | 16.51,3.81 C8.+
  Top 0.813: CN1.VCC 8.45,21.15 10.16,22.86 16.51,22.86 | 16.51,22.86 19.68,22.86 | 19.68,22.86 22.86,22.86 | 22.86,22.86 24.77,22.86 | 24.77,22.86 40.64,22.86 41.91,21.59 45.72,21.59 | MCU1.4 17.14,9.54 | 17.14,9.54 18.41,9.54 18.41,9.53 20.95,12.06 20.95,13.97 24.77,17.78 24.77,22.86 | R1.2 16.51,22.86 | R2.2 19.68,22.86 | R3.2 22.86,22.86 | C8.+ 17.34,9.35 17.14,9.54 | C7.1 15.88,4.45 16.51,3.81
VCC1
  Top 0.406: CN4.VCC 96.52,21.15 96.52,21.59 | 67.31,3.81 C16.+
  Top 0.813: CN3.VCC 59.25,21.15 60.96,22.86 67.31,22.86 | 67.31,22.86 70.48,22.86 | 70.48,22.86 73.66,22.86 | 73.66,22.86 75.56,22.86 | 75.56,22.86 91.44,22.86 92.71,21.59 96.52,21.59 | MCU2.4 67.94,9.54 | 67.94,9.54 69.2,9.54 69.22,9.53 71.75,12.06 71.75,13.97 75.56,17.78 75.56,22.86 | R7.2 67.31,22.86 | R8.2 70.48,22.86 | R9.2 73.66,22.86 | C16.+ 68.14,9.35 67.94,9.54 | C15.1 66.67,4.45 67.31,3.81
VCC2
  Top 0.406: CN6.VCC 96.52,46.55 96.52,46.99 | 67.31,29.21 C24.+
  Top 0.813: CN5.VCC 59.25,46.55 60.96,48.26 67.31,48.26 | 67.31,48.26 70.48,48.26 | 70.48,48.26 73.66,48.26 | 73.66,48.26 75.56,48.26 | 75.56,48.26 91.44,48.26 92.71,46.99 96.52,46.99 | MCU3.4 67.94,34.94 | 67.94,34.94 69.2,34.94 69.22,34.92 71.75,37.47 71.75,39.37 75.56,43.18 75.56,48.26 | R13.2 67.31,48.26 | R14.2 70.48,48.26 | R15.2 73.66,48.26 | C24.+ 68.14,34.74 67.94,34.94 | C23.1 66.67,29.84 67.31,29.21
VCC3
  Top 0.406: CN8.VCC 45.72,46.55 45.72,46.99 | 16.51,29.21 C32.+
  Top 0.813: CN7.VCC 8.45,46.55 10.16,48.26 16.51,48.26 | 16.51,48.26 19.68,48.26 | 19.68,48.26 22.86,48.26 | 22.86,48.26 24.77,48.26 | 24.77,48.26 40.64,48.26 41.91,46.99 45.72,46.99 | MCU4.4 17.14,34.94 | 17.14,34.94 18.41,34.94 18.41,34.92 20.95,37.47 20.95,39.37 24.77,43.18 24.77,48.26 | R19.2 16.51,48.26 | R20.2 19.68,48.26 | R21.2 22.86,48.26 | C32.+ 17.34,34.74 17.14,34.94 | C31.1 15.88,29.84 16.51,29.21
VCC4
  Top 0.406: CN10.VCC 45.72,71.95 45.72,72.39 | 16.51,54.61 C40.+
  Top 0.813: CN9.VCC 8.45,71.95 10.16,73.66 16.51,73.66 | 16.51,73.66 19.68,73.66 | 19.68,73.66 22.86,73.66 | 22.86,73.66 24.77,73.66 | 24.77,73.66 40.64,73.66 41.91,72.39 45.72,72.39 | MCU5.4 17.14,60.34 | 17.14,60.34 18.41,60.34 18.41,60.33 20.95,62.87 20.95,64.77 24.77,68.58 24.77,73.66 | R25.2 16.51,73.66 | R26.2 19.68,73.66 | R27.2 22.86,73.66 | C40.+ 17.34,60.15 17.14,60.34 | C39.1 15.88,55.24 16.51,54.61
VCC5
  Top 0.406: CN12.VCC 96.52,71.95 96.52,72.39 | 67.31,54.61 C48.+
  Top 0.813: CN11.VCC 59.25,71.95 60.96,73.66 67.31,73.66 | 67.31,73.66 70.48,73.66 | 70.48,73.66 73.66,73.66 | 73.66,73.66 75.56,73.66 | 75.56,73.66 91.44,73.66 92.71,72.39 96.52,72.39 | MCU6.4 67.94,60.34 | 67.94,60.34 69.2,60.34 69.22,60.33 71.75,62.87 71.75,64.77 75.56,68.58 75.56,73.66 | R31.2 67.31,73.66 | R32.2 70.48,73.66 | R33.2 73.66,73.66 | C48.+ 68.14,60.15 67.94,60.34 | C47.1 66.67,55.24 67.31,54.61
VCC6
  Top 0.406: CN14.VCC 45.72,97.35 45.72,97.79 | 16.51,80.01 C56.+
  Top 0.813: CN13.VCC 8.45,97.35 10.16,99.06 16.51,99.06 | 16.51,99.06 19.68,99.06 | 19.68,99.06 22.86,99.06 | 22.86,99.06 24.77,99.06 | 24.77,99.06 40.64,99.06 41.91,97.79 45.72,97.79 | MCU7.4 17.14,85.73 | 17.14,85.73 18.41,85.73 18.41,85.72 20.95,88.27 20.95,90.17 24.77,93.98 24.77,99.06 | R37.2 16.51,99.06 | R38.2 19.68,99.06 | R39.2 22.86,99.06 | C56.+ 17.34,85.55 17.14,85.73 | C55.1 15.88,80.64 16.51,80.01
VCC7
  Top 0.406: CN16.VCC 96.52,97.35 96.52,97.79 | 67.31,80.01 C64.+
  Top 0.813: CN15.VCC 59.25,97.35 60.96,99.06 67.31,99.06 | 67.31,99.06 70.48,99.06 | 70.48,99.06 73.66,99.06 | 73.66,99.06 75.56,99.06 | 75.56,99.06 91.44,99.06 92.71,97.79 96.52,97.79 | MCU8.4 67.94,85.73 | 67.94,85.73 69.2,85.73 69.22,85.72 71.75,88.27 71.75,90.17 75.56,93.98 75.56,99.06 | R43.2 67.31,99.06 | R44.2 70.48,99.06 | R45.2 73.66,99.06 | C64.+ 68.14,85.55 67.94,85.73 | C63.1 66.67,80.64 67.31,80.01

## Text on the board
tPlace: VIN | VOUT | VIN | VOUT | GI | GO | GI | GO | BI | BO | BI | BO | RI | RO | RI | RO | GND | GND | GND | GND | VIN | VOUT | VIN | VOUT | GI | GO | GI | GO | BI | BO | BI | BO | RI | RO | RI | RO | GND | GND | GND | GND | VIN | VOUT | VIN | VOUT | GI | GO | GI | GO | BI | BO | BI | BO | RI | RO | RI | RO | GND | GND | GND | GND | VIN | VOUT | VIN | VOUT | GI | GO | GI | GO | BI | BO | BI | BO | RI | RO | RI | RO | GND | GND | GND | GND
bPlace: RGB Amplifier | RGB Amplifier | Kirkoryan Special Edition / / ReDesigned By / Özay Turay / a.k.a Simon/CGTr / http://www.commodore.gen.tr | Kirkoryan Special Edition / / ReDesigned By / Özay Turay / a.k.a Simon/CGTr / http://www.commodore.gen.tr | RGB Amplifier | RGB Amplifier | Kirkoryan Special Edition / / ReDesigned By / Özay Turay / a.k.a Simon/CGTr / http://www.commodore.gen.tr | Kirkoryan Special Edition / / ReDesigned By / Özay Turay / a.k.a Simon/CGTr / http://www.commodore.gen.tr | RGB Amplifier | RGB Amplifier | Kirkoryan Special Edition / / ReDesigned By / Özay Turay / a.k.a Simon/CGTr / http://www.commodore.gen.tr | Kirkoryan Special Edition / / ReDesigned By / Özay Turay / a.k.a Simon/CGTr / http://www.commodore.gen.tr | RGB Amplifier | RGB Amplifier | Kirkoryan Special Edition / / ReDesigned By / Özay Turay / a.k.a Simon/CGTr / http://www.commodore.gen.tr | Kirkoryan Special Edition / / ReDesigned By / Özay Turay / a.k.a Simon/CGTr / http://www.commodore.gen.tr